# EAGLE board ArmazRelay - RevA1 (EAGLE 7.7.0)
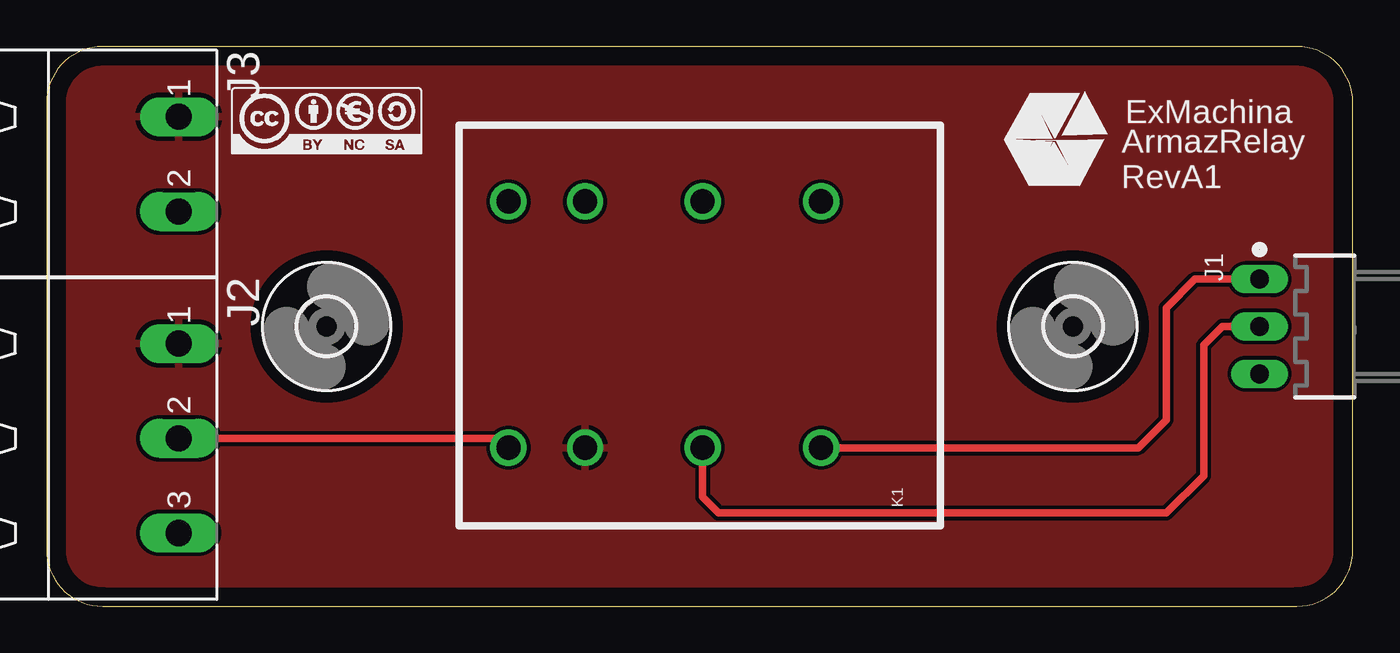
[diagram p0: board, top side]
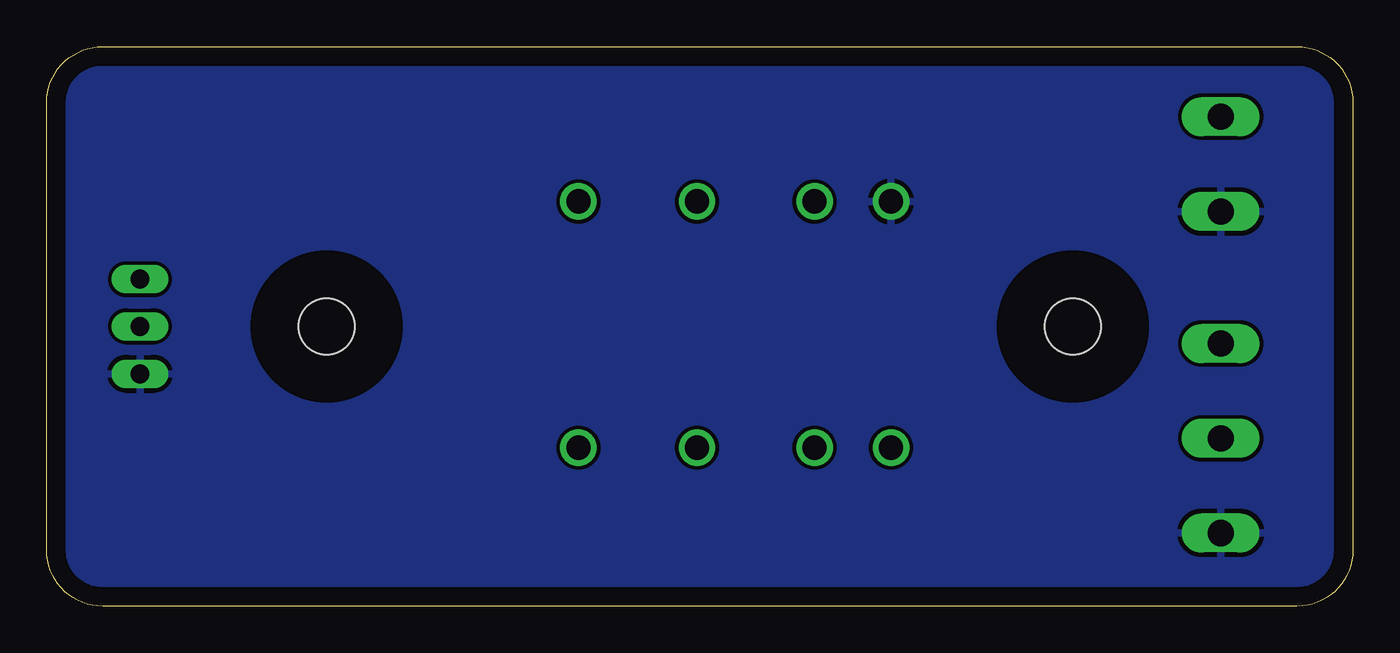
[diagram p1: board, bottom side, seen from below]

Size 70 x 30 mm. Coordinates in mm from the lower left corner, seen from the top.
Outline: 0,27 0,3 arc90 3,0 67,0 arc90 70,3 70,27 arc90 67,30 3,30 arc90 0,27
Copper layers (1*16): Top 0.035mm / dielectric 1.5mm / Bottom 0.035mm
Design rules "default *": minimum track width 10mil, minimum drill 0.6mm, track to track 8mil, track to pad 8mil, pad to pad 8mil, via to via 8mil, smd to smd 8mil, copper to edge 40mil, drill to drill 8mil, minimum pad ring 10mil, minimum via ring 8mil, stop-mask expansion 4mil, vias tented up to drill 0mil, thermal gap 10mil

## Footprints (pad centres in the part's own frame; a part is rotated, then mirrored left to right if it is on the bottom)
3,0 = hole 3: 0,0
7395-03 = drill 1.016 long: 1 2.54,0; 2 0,0; 3 -2.54,0
MSTBA3 = drill 1.397 long: 1 -5.08,5.08; 2 0,5.08; 3 5.08,5.08
MSTBA2 = drill 1.397 long: 1 -2.54,5.08; 2 2.54,5.08
PY08 = drill 1.3: 1 -6.5,-6.5; 4 6.7,-6.5; 5 -6.5,-0.15; 8 6.7,-0.15; 9 -6.5,6.15; 12 6.7,6.15; 13 -6.5,10.25; 14 6.7,10.25

## Placement (x,y rotation side)
CC1  CC-BY-NC-SA  [CC-BY-NC-SA]  15,26 0 top
H1  MOUNT-HOLE3.0  [3,0]  15,15 0 top
H2  MOUNT-HOLE3.0  [3,0]  55,15 0 top
J1  22-05-7038-03  [7395-03]  65,15 90 top
J2  MSTBA3  [MSTBA3]  2,9 270 top
J3  MSTBA2  [MSTBA2]  2,23.7 270 top
K1  MY2  [PY08]  35,15 90 top
T1  EXMACHINA-LOGO-NAME  [EXM-LOGO-BASELINE]  54,25 0 top

## Library data of the parts
CC1 = cc-by-sa
H1 H2 = holes
J1 = con-molex; OC_FARNELL: 9731610; OC_NEWARK: unknown
J2 = con-phoenix-508; MF: FARNELL; MPN: 1757255; OC_FARNELL: 3705183; OC_NEWARK: 71C4162
J3 = con-phoenix-508; MF: FARNELL; MPN: 1757242; OC_FARNELL: 3705171; OC_NEWARK: 71C4161
K1 = rel-omron
T1 = exmachina

## Nets
+24V: J2.1 J3.1 K1.9
GND: J1.3 J2.3 J3.2 K1.14
SIG_IN: J2.2 K1.13
SIG_NC: J1.1 K1.1
SIG_NO: J1.2 K1.5

## Tracks (layer width: path | path; a pad name or v marks a point on that pad's centre or on a via)
+24V
  pour Top: -15,45 103,45 103,-21 -15,-21
GND
  pour Bottom: -13,43 101,43 101,25 101,-20 59,-20 -13,-20
SIG_IN
  Top 0.406: J2.2 24.25,9 K1.13
SIG_NC
  Top 0.406: K1.1 58.5,8.5 60,10 60,16 61.54,17.54 J1.1
SIG_NO
  Top 0.406: K1.5 35.15,5.85 36,5 60,5 62,7 62,14 63,15 J1.2

## Text on the board
tPlace: ArmazRelay / RevA1